# EAGLE board HotFire_BreakoutBoard (EAGLE 9.0.1)
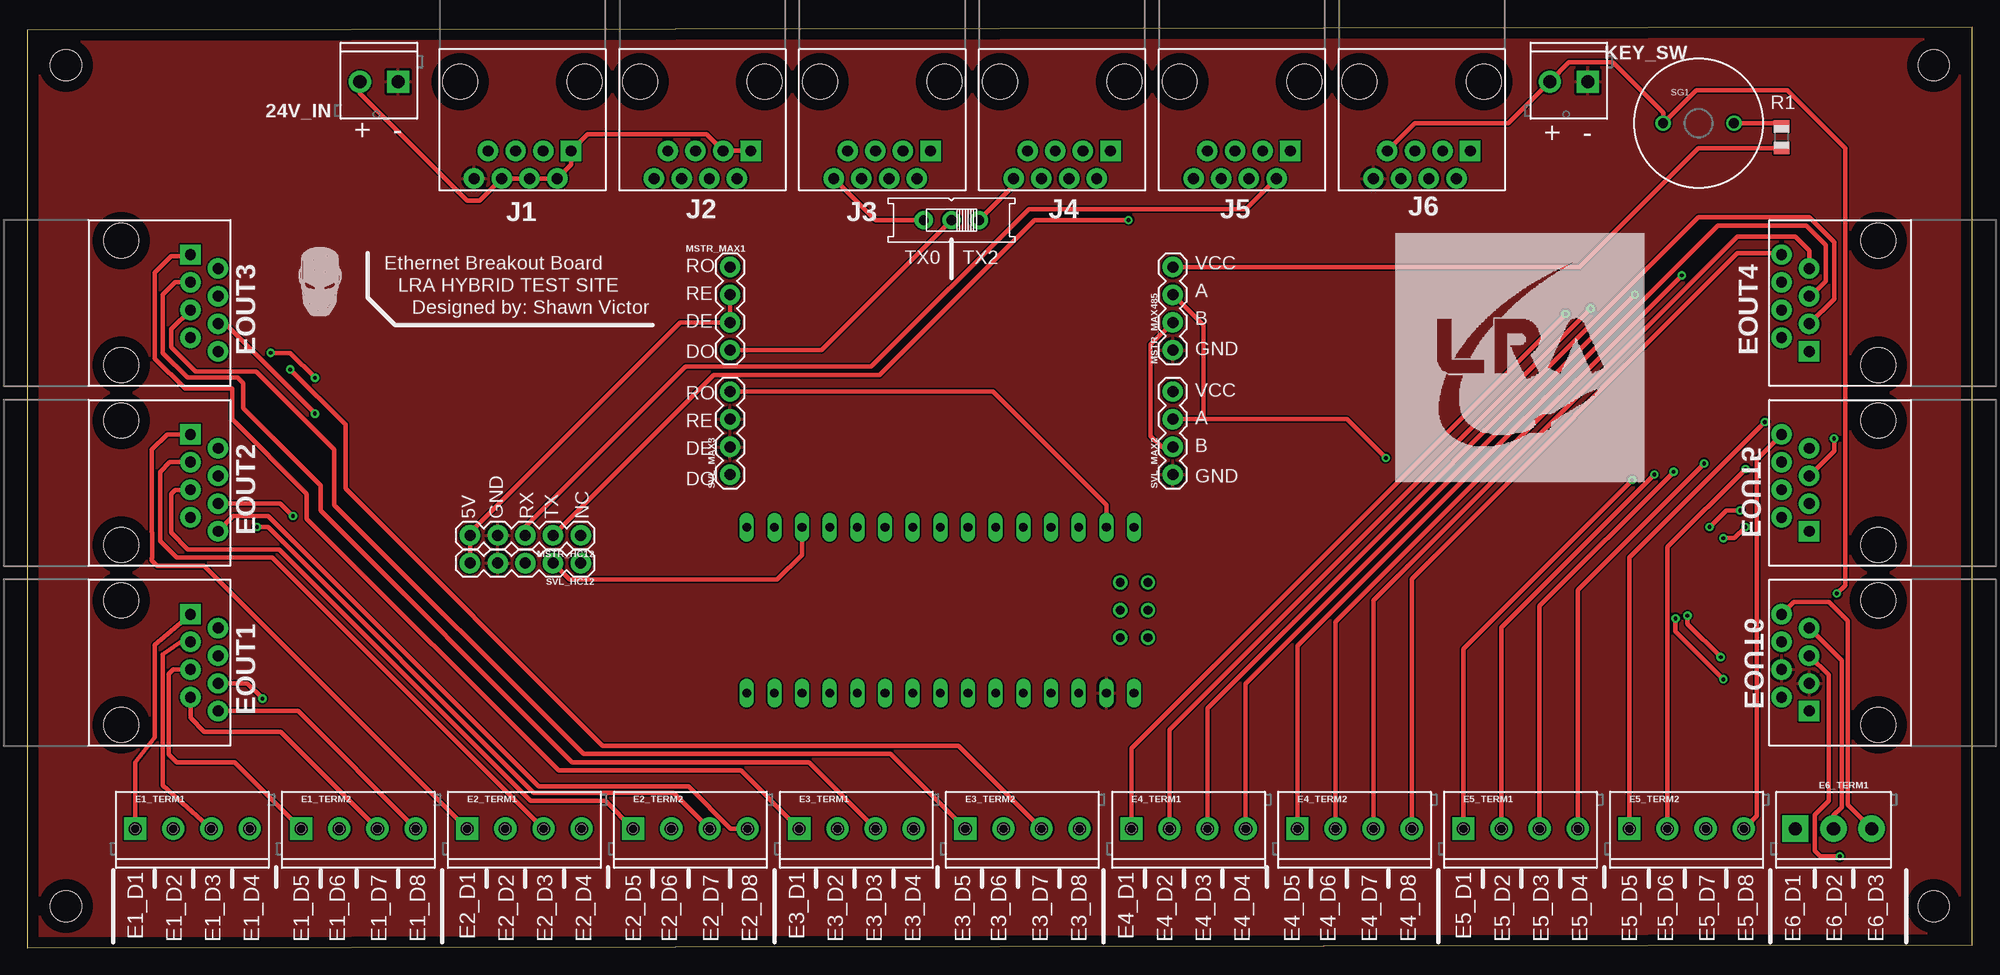
[diagram p0: board, top side]
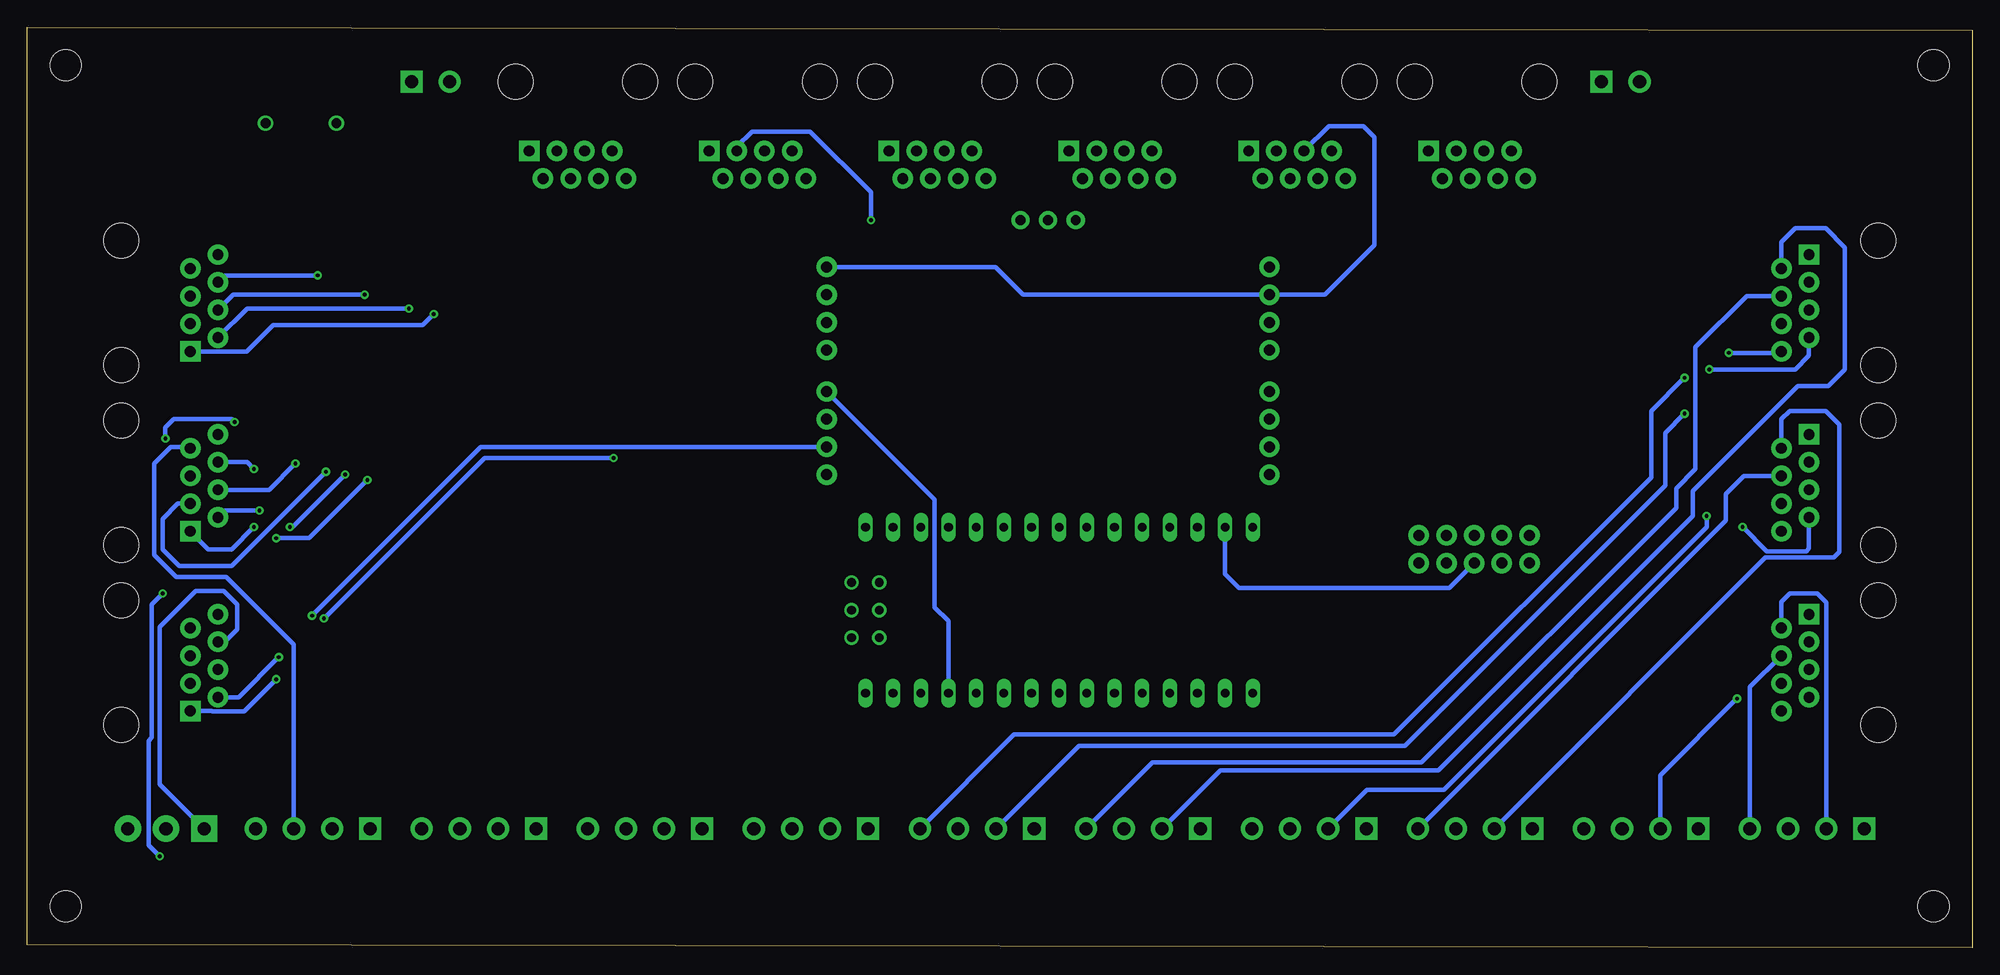
[diagram p1: board, bottom side, seen from below]

Size 178.54 x 84.51 mm. Coordinates in mm from the lower left corner, seen from the top.
Outline: 0,0 178.54,0.25 178.54,84.51 0,84.25 0,0
Copper layers (1*16): Top 0.035mm / dielectric 1.5mm / Bottom 0.035mm
Design rules "default": minimum track width 6mil, minimum drill 0.35mm, track to track 6mil, track to pad 6mil, pad to pad 6mil, via to via 6mil, smd to smd 6mil, copper to edge 40mil, drill to drill 6mil, minimum pad ring 10mil, minimum via ring 8mil, stop-mask expansion 4mil, vias tented up to drill 0mil, thermal gap 10mil
Net classes: 0 default: width 0.203 mm, drill 0.254 mm, clearance 0.127 mm; 1 16mil: width 0.254 mm, drill 0.254 mm, clearance 0.127 mm; 2 24mil: width 0.254 mm, drill 0.254 mm, clearance 0.127 mm; 3 32mil: width 0.254 mm, drill 0.254 mm, clearance 0.127 mm
Holes 2.84 mm at 3.56,81.03 3.56,3.81 175.01,81.03 175.01,3.81

## Footprints (pad centres in the part's own frame; a part is rotated, then mirrored left to right if it is on the bottom)
SCREWTERMINAL-3.5MM-2 = drill 1.2 pad 2.032 square: 1 0,0 | drill 1.2 pad 2.032: 2 3.5,0
SCREWTERMINAL-3.5MM-4 = drill 1.2 pad 2.032 square: 1 0,0 | drill 1.2 pad 2.032: 2 3.5,0; 3 7,0; 4 10.5,0
SCREWTERMINAL-3.5MM-3 = drill 1.2 pad 2.413 square: 1 0,0 | drill 1.2 pad 2.413: 2 3.5,0; 3 7,0
RJ45-8 = drill 1 pad 1.88 square: 1 -4.445,6.35 | drill 1 pad 1.88: 2 -3.175,8.89; 3 -1.905,6.35; 4 -0.635,8.89; 5 0.635,6.35; 6 1.905,8.89; 7 3.175,6.35; 8 4.445,8.89 | hole 3.2: -5.715,0; 5.715,0
1X05 = drill 1.016 pad 1.88: 1 0,0; 2 2.54,0; 3 5.08,0; 4 7.62,0; 5 10.16,0
1X04 = drill 1.016 pad 1.88: 1 0,0; 2 2.54,0; 3 5.08,0; 4 7.62,0
R0805 = smd 1.1 x 1.4: 1 -1,0; 2 1,0
EG1218 = drill 0.9 pad 1.676: O -2.54,0; P 0,0; S 2.54,0
BUZZER-12MM = drill 0.9: + 3.25,0; - -3.25,0
NANO = drill 0.8 long: 3.3V -10.16,24.13; 5V -10.16,-1.27; A0 -10.16,19.05; A1 -10.16,16.51; A2 -10.16,13.97; A3 -10.16,11.43; A4 -10.16,8.89; A5 -10.16,6.35; A6 -10.16,3.81; A7 -10.16,1.27; AREF -10.16,21.59; D2 5.08,1.27; D3 5.08,3.81; D4 5.08,6.35; D5 5.08,8.89; D6 5.08,11.43; D7 5.08,13.97; D8 5.08,16.51; D9 5.08,19.05; D10 5.08,21.59; D11 5.08,24.13; D12 5.08,26.67; D13 -10.16,26.67; GND -10.16,-6.35; GND1 5.08,-1.27; RAW -10.16,-8.89; RST -10.16,-3.81; RST1 5.08,-3.81; RX1 5.08,-6.35; TX0 5.08,-8.89 | drill 0.8: ICSP1 -5.08,-10.16; ICSP2 -5.08,-7.62; ICSP3 -2.54,-10.16; ICSP4 -2.54,-7.62; ICSP5 0,-10.16; ICSP6 0,-7.62

## Placement (x,y rotation side)
24V_IN  [SCREWTERMINAL-3.5MM-2]  34.04,79.5 180 top
E1_TERM1  [SCREWTERMINAL-3.5MM-4]  9.91,10.92 0 top
E1_TERM2  [SCREWTERMINAL-3.5MM-4]  25.15,10.92 0 top
E2_TERM1  [SCREWTERMINAL-3.5MM-4]  40.39,10.92 0 top
E2_TERM2  [SCREWTERMINAL-3.5MM-4]  55.63,10.92 0 top
E3_TERM1  [SCREWTERMINAL-3.5MM-4]  70.87,10.92 0 top
E3_TERM2  [SCREWTERMINAL-3.5MM-4]  86.11,10.92 0 top
E4_TERM1  [SCREWTERMINAL-3.5MM-4]  101.35,10.92 0 top
E4_TERM2  [SCREWTERMINAL-3.5MM-4]  116.59,10.92 0 top
E5_TERM1  [SCREWTERMINAL-3.5MM-4]  131.83,10.92 0 top
E5_TERM2  [SCREWTERMINAL-3.5MM-4]  147.07,10.92 0 top
E6_TERM1  [SCREWTERMINAL-3.5MM-3]  162.31,10.92 0 top
EOUT1  RJ45  [RJ45-8]  8.64,26.16 270 top
EOUT2  RJ45  [RJ45-8]  8.64,42.67 270 top
EOUT3  RJ45  [RJ45-8]  8.64,59.18 270 top
EOUT4  RJ45  [RJ45-8]  169.93,59.18 90 top
EOUT5  RJ45  [RJ45-8]  169.93,42.67 90 top
EOUT6  RJ45  [RJ45-8]  169.93,26.16 90 top
J1  RJ45  [RJ45-8]  45.47,79.5 180 top
J2  RJ45  [RJ45-8]  61.98,79.5 180 top
J3  RJ45  [RJ45-8]  78.49,79.5 180 top
J4  RJ45  [RJ45-8]  95,79.5 180 top
J5  RJ45  [RJ45-8]  111.51,79.5 180 top
J6  RJ45  [RJ45-8]  128.02,79.5 180 top
KEY_SW  [SCREWTERMINAL-3.5MM-2]  143.26,79.5 180 top
MSTR_HC12  [1X05]  50.8,37.85 180 top
MSTR_MAX1  [1X04]  64.52,54.86 90 top
MSTR_MAX485  [1X04]  105.16,54.86 90 top
R1  100  [R0805]  161.04,74.42 270 top
S1  [EG1218]  84.84,66.8 180 top
SG1  BUZZERPTH  [BUZZER-12MM]  153.42,75.69 0 top
SVL_HC12  [1X05]  50.8,35.31 180 top
SVL_MAX2  [1X04]  105.16,43.43 90 top
SVL_MAX3  [1X04]  64.52,43.43 90 top
U$4  NANO  [NANO]  92.71,33.53 90 top

## Library data of the parts
24V_IN KEY_SW = SparkFun-Connectors; PROD_ID: CONN-08399
E1_TERM1 E1_TERM2 E2_TERM1 E2_TERM2 E3_TERM1 E3_TERM2 E4_TERM1 E4_TERM2 E5_TERM1 E5_TERM2 = SparkFun-Connectors; PROD_ID: 2xCONN-08399; SF_ID: 2xPRT-08084
E6_TERM1 = SparkFun-Connectors; PROD_ID: CONN-08288; SF_ID: PRT-08235
EOUT1-EOUT6 J1-J6 = SparkFun-Connectors; PROD_ID: CONN-08506; SF_ID: PRT-00643
MSTR_HC12 SVL_HC12 = SparkFun-Connectors
MSTR_MAX1 MSTR_MAX485 SVL_MAX2 SVL_MAX3 = SparkFun-Connectors; PROD_ID: CONN-09696
R1 S1 = adafruit
SG1 = SparkFun
U$4 = Arduino-clone

## Nets
5.0V [16mil]: J2.5 MSTR_HC12.5 MSTR_MAX1.2 MSTR_MAX1.3 MSTR_MAX485.4 R1.2 SVL_HC12.5
+24V [24mil]: 24V_IN.2 J1.1 J1.2 J1.4 J1.6 J2.1 J2.3
ADC0: J6.1
ADC1: J6.2
ADC2: J6.3
ADC3: J6.4
ADC4: J6.5
ADC5: J6.6
D0/RX0: J3.7
D1/TX0: J3.8 S1.S
D10: SVL_HC12.2 U$4.D10
D11: SVL_HC12.3 U$4.D11
D+: J3.5
D-: J3.6
E1_D1: E1_TERM1.1 EOUT1.1
E1_D2: E1_TERM1.2 EOUT1.2
E1_D3: E1_TERM1.3 EOUT1.3
E1_D4: E1_TERM1.4 EOUT1.4
E1_D5: E1_TERM2.1 EOUT1.5
E1_D6: E1_TERM2.2 EOUT1.6
E1_D7: E1_TERM2.3 EOUT1.7
E1_D8: E1_TERM2.4 EOUT1.8
E2_D1: E2_TERM1.1 EOUT2.1
E2_D2: E2_TERM1.2 EOUT2.2
E2_D3: E2_TERM1.3 EOUT2.3
E2_D4: E2_TERM1.4 EOUT2.4
E2_D5: E2_TERM2.1 EOUT2.5
E2_D6: E2_TERM2.2 EOUT2.6
E2_D7: E2_TERM2.3 EOUT2.7
E2_D8: E2_TERM2.4 EOUT2.8
E3_D1: E3_TERM1.1 EOUT3.1
E3_D2: E3_TERM1.2 EOUT3.2
E3_D3: E3_TERM1.3 EOUT3.3
E3_D4: E3_TERM1.4 EOUT3.4
E3_D5: E3_TERM2.1 EOUT3.5
E3_D6: E3_TERM2.2 EOUT3.6
E3_D7: E3_TERM2.3 EOUT3.7
E3_D8: E3_TERM2.4 EOUT3.8
E4_D1: E4_TERM1.1 EOUT4.1
E4_D2: E4_TERM1.2 EOUT4.2
E4_D3: E4_TERM1.3 EOUT4.3
E4_D4: E4_TERM1.4 EOUT4.4
E4_D5: E4_TERM2.1 EOUT4.5
E4_D6: E4_TERM2.2 EOUT4.6
E4_D7: E4_TERM2.3 EOUT4.7
E4_D8: E4_TERM2.4 EOUT4.8
E5_D1: E5_TERM1.1 EOUT5.1
E5_D2: E5_TERM1.2 EOUT5.2
E5_D3: E5_TERM1.3 EOUT5.3
E5_D4: E5_TERM1.4 EOUT5.4
E5_D5: E5_TERM2.1 EOUT5.5
E5_D6: E5_TERM2.2 EOUT5.6
E5_D7: E5_TERM2.3 EOUT5.7
E5_D8: E5_TERM2.4 EOUT5.8
E6_D1: E6_TERM1.1 EOUT6.6
E6_D2: E6_TERM1.2 EOUT6.7
E6_D3: E6_TERM1.3 EOUT6.8
ETHERNET1: J4.1
ETHERNET2: J4.2
ETHERNET3: J4.3
ETHERNET4: J4.4
ETHERNET5: J4.5
ETHERNET6: J4.6
ETHERNET7: J4.7
ETHERNET8: J4.8 S1.O
ETHERNET9: J5.1
ETHERNET10: J5.2 MSTR_HC12.3
ETHERNET11: J5.3 MSTR_HC12.2
ETHERNET12: J5.4
ETHERNET13: J5.5
ETHERNET14: J5.6
ETHERNET15: J5.7
ETHERNET16: J5.8
GND [32mil]: 24V_IN.1 EOUT6.3 EOUT6.4 J1.8 J6.8 KEY_SW.1 MSTR_HC12.4 MSTR_MAX485.1 SVL_HC12.4 SVL_MAX2.1 SVL_MAX3.2 SVL_MAX3.3 U$4.GND
IGNITER_SW- [32mil]: J2.6
KEY_SW+ [32mil]: EOUT6.5 J6.7 KEY_SW.2 SG1.-
LS1: J2.7
LS2: J2.8
LS3: J3.1
LS4: J3.2
LS5: J3.3
MAX_A: EOUT6.1 MSTR_MAX485.3 SVL_MAX2.3
MAX_B: EOUT6.2 MSTR_MAX485.2 SVL_MAX2.2
N$1: MSTR_MAX1.1 S1.P
N$5 [16mil]: R1.1 SG1.+
NV_2_SW- [24mil]: J1.5
OV_4_SW- [24mil]: J1.7
OV_5_SW- [24mil]: J2.2
SLV_RX: SVL_MAX3.4 U$4.RX1
SOL_5_SW- [24mil]: J2.4
SVL_5V: SVL_MAX2.4 U$4.5V
VUSB [16mil]: J3.4
WSV_2_SW- [24mil]: J1.3

## Tracks (layer width: path | path; a pad name or v marks a point on that pad's centre or on a via)
5.0V
  Top 0.406: MSTR_MAX1.3 MSTR_MAX1.2 59.94,57.4 40.64,38.1 MSTR_HC12.5 SVL_HC12.5 | MSTR_MAX485.4 142.49,62.48 153.42,73.41 161.02,73.41 R1.2
  Bottom 0.406: J2.5 59.05,75.44 55.88,75.44 54.86,74.42 54.86,64.52 59.44,59.94 MSTR_MAX1.3 87.12,59.94 89.66,62.48 MSTR_MAX485.4
+24V
  Top 0.406: 24V_IN.2 30.54,78.43 40.39,68.58 41.53,68.58 J1.6 J1.4 J1.2 49.91,71.88 J1.1 51.44,74.68 62.36,74.68 J2.3 J2.1
D1/TX0
  Top 0.406: J3.8 77.85,66.8 S1.S
D10
  Top 0.406: SVL_HC12.2 49.78,33.78 68.83,33.78 71.12,36.07 U$4.D10
D11
  Bottom 0.406: SVL_HC12.3 48.01,33.02 67.31,33.02 68.58,34.29 U$4.D11
E1_D1
  Top 0.406: E1_TERM1.1 9.91,17.02 11.68,19.3 11.68,27.81 EOUT1.1
E1_D2
  Bottom 0.406: E1_TERM1.2 13.41,31.69 14.22,32.51 16.76,32.51 17.53,31.75 EOUT1.2
E1_D3
  Top 0.406: E1_TERM1.3 12.45,14.87 12.45,26.92 14.1,28.07 EOUT1.3
E1_D4
  Bottom 0.406: E1_TERM1.4 20.41,23.92 EOUT1.4
E1_D5
  Top 0.406: E1_TERM2.1 19.05,17.02 13.72,17.02 13.01,17.73 13.01,25.15 13.39,25.53 EOUT1.5
E1_D6  (via drill 0.35)
  Top 0.406: v21.59,22.86 20.19,24.26 EOUT1.6
  Bottom 0.406: E1_TERM2.2 28.65,15.8 v21.59,22.86
E1_D7
  Top 0.406: E1_TERM2.3 23.26,19.81 16.26,19.81 14.99,21.08 EOUT1.7
E1_D8
  Top 0.406: E1_TERM2.4 24.85,21.72 EOUT1.8
E2_D1
  Top 0.406: E2_TERM1.1 16.26,35.05 11.94,35.05 11.43,35.56 11.43,35.76 11.46,35.79 11.46,38.12 11.43,38.15 11.43,45.72 12.83,47.12 EOUT2.1
E2_D2
  Bottom 0.406: E2_TERM1.2 18.99,35.81 12.7,35.81 12.19,36.32 12.19,48.01 13.46,49.28 16.76,49.28 17.53,48.51 EOUT2.2
E2_D3
  Top 0.406: E2_TERM1.3 22.49,35.81 13.72,35.81 12.19,37.34 12.19,43.69 13.08,44.58 EOUT2.3
E2_D4
  Bottom 0.406: E2_TERM1.4 22.61,39.2 22.61,41.66 20.95,43.31 EOUT2.4
E2_D5
  Top 0.406: E2_TERM2.1 53.09,13.46 46.23,13.46 23.11,36.58 14.73,36.58 13.21,38.1 13.21,41.66 13.59,42.04 EOUT2.5
E2_D6  (via drill 0.35)
  Top 0.406: v24.38,39.62 23.24,40.77 EOUT2.6
  Bottom 0.406: E2_TERM2.2 55.57,14.48 48.51,14.48 24.38,38.61 v24.38,39.62
E2_D7  (via drill 0.35)
  Top 0.406: E2_TERM2.3 59.32,14.22 46.48,14.22 22.1,38.61 v21.08,38.61
  Bottom 0.406: v21.08,38.61 18.85,36.37 15.24,36.37 14.99,36.63 EOUT2.7
E2_D8
  Top 0.406: E2_TERM2.4 64.57,10.92 60.7,14.78 46.94,14.78 22.1,39.62 18.92,39.62 EOUT2.8
E3_D1
  Top 0.406: E3_TERM1.1 65.53,16.26 48.77,16.26 25.65,39.37 25.65,41.66 18.8,48.51 18.8,51.31 14.48,51.31 11.68,54.1 11.68,61.98 13.21,63.5 14.86,63.5 EOUT3.1
E3_D2
  Bottom 0.406: E3_TERM1.2 69.03,16.26 49.02,16.26 25.65,39.62 25.65,41.91 16,51.56 13.21,51.56 11.68,53.09 11.68,64.26 13.46,66.04 16.26,66.04 17.53,64.77 EOUT3.2
E3_D3
  Top 0.406: E3_TERM1.3 71.77,17.02 50.04,17.02 26.92,40.13 26.92,42.42 19.81,49.53 19.81,51.82 19.3,52.32 14.73,52.32 12.45,54.61 12.45,59.94 13.59,61.09 EOUT3.3
E3_D4
  Bottom 0.406: E3_TERM1.4 75.27,17.02 50.55,17.02 27.18,40.39 27.18,42.16 25.4,43.94 25.4,55.12 20.7,59.82 EOUT3.4
E3_D5
  Top 0.406: E3_TERM2.1 79.25,17.78 51.05,17.78 28.19,40.64 28.19,45.72 21.03,52.88 15.44,52.88 13.21,55.12 13.21,56.77 EOUT3.5
E3_D6  (via drill 0.35)
  Top 0.406: v26.42,49.02 18.16,57.28 EOUT3.6
  Bottom 0.406: E3_TERM2.2 81.99,18.54 52.07,18.54 28.19,42.42 28.19,47.24 v26.42,49.02
E3_D7  (via drill 0.35)
  Top 0.406: E3_TERM2.3 85.49,18.54 52.83,18.54 29.21,42.16 29.21,48.01 v24.13,53.09
  Bottom 0.406: v24.13,53.09 16.26,53.09 14.99,54.36 EOUT3.7
E3_D8  (via drill 0.35)
  Top 0.406: v26.42,52.32 24.13,54.61 v22.35,54.61
  Bottom 0.406: E3_TERM2.4 87.97,19.56 53.09,19.56 29.46,43.18 29.46,49.28 v26.42,52.32 | v22.35,54.61 17.65,54.61 EOUT3.8
E4_D1  (via drill 0.35)
  Top 0.406: E4_TERM1.1 101.35,18.29 v141.22,58.17
  Bottom 0.406: v141.22,58.17 142.24,57.15 155.96,57.15 158.39,54.71 161.57,54.71 161.6,54.74 EOUT4.1
E4_D2  (via drill 0.35)
  Top 0.406: E4_TERM1.2 104.85,20.01 v143.51,58.67
  Bottom 0.406: v143.51,58.67 158.37,58.67 EOUT4.2
E4_D3
  Top 0.406: E4_TERM1.3 108.35,21.99 153.42,67.06 163.58,67.06 165.86,64.77 165.86,59.56 EOUT4.3
E4_D4  (via drill 0.35)
  Top 0.406: E4_TERM1.4 111.85,24.22 v147.57,59.94
  Bottom 0.406: v147.57,59.94 159.64,59.94 EOUT4.4
E4_D5
  Top 0.406: E4_TERM2.1 116.59,27.69 155.19,66.29 163.32,66.29 165.1,64.52 165.1,61.21 163.7,59.82 EOUT4.5
E4_D6  (via drill 0.35)
  Top 0.406: E4_TERM2.2 120.09,29.92 v151.89,61.72
  Bottom 0.406: v151.89,61.72 160.4,61.72 EOUT4.6
E4_D7
  Top 0.406: E4_TERM2.3 123.59,31.89 156.97,65.28 162.31,65.28 163.58,64.01 EOUT4.7
E4_D8
  Top 0.406: E4_TERM2.4 127.09,33.87 156.97,63.75 160.91,63.75 EOUT4.8
E5_D1  (via drill 0.35)
  Top 0.406: E5_TERM1.1 131.83,27.43 v147.32,42.93 | v155.7,37.59 156.72,37.59 v157.73,38.61
  Bottom 0.406: v147.32,42.93 152.65,37.59 v155.7,37.59 | v157.73,38.61 159.77,36.58 161.93,36.58 EOUT5.1
E5_D2  (via drill 0.35)
  Top 0.406: E5_TERM1.2 135.33,29.41 v149.35,43.43 | v154.43,38.61 155.96,40.13 v157.23,40.13
  Bottom 0.406: v149.35,43.43 154.18,38.61 v154.43,38.61 | v157.23,40.13 160.4,40.13 EOUT5.2
E5_D3  (via drill 0.35)
  Top 0.406: E5_TERM1.3 138.83,31.38 v151.13,43.69
  Bottom 0.406: v151.13,43.69 159.77,35.05 164.59,35.05 166.12,36.58 166.12,39.37 164.72,40.77 EOUT5.3
E5_D4  (via drill 0.35)
  Top 0.406: E5_TERM1.4 142.33,32.85 v153.92,44.45
  Bottom 0.406: v153.92,44.45 156.34,42.04 EOUT5.4
E5_D5  (via drill 0.35)
  Top 0.406: E5_TERM2.1 147.07,35.81 v159.51,48.26 | EOUT5.5 165.86,45.59 v165.86,46.74
  Bottom 0.406: v159.51,48.26 159.77,48.51 165.1,48.51 165.86,47.75 v165.86,46.74
E5_D6  (via drill 0.35)
  Top 0.406: E5_TERM2.2 150.57,36.77 v157.73,43.94
  Bottom 0.406: v157.73,43.94 158.37,44.58 EOUT5.6
E5_D7
  Bottom 0.406: E5_TERM2.3 154.07,27.83 160.27,34.04 164.85,34.04 166.88,36.07 166.88,44.45 165.35,45.97 163.7,45.97 EOUT5.7
E5_D8
  Top 0.406: E5_TERM2.4 158.75,12.11 158.75,44.83 EOUT5.8
E6_D1
  Bottom 0.406: E6_TERM1.1 166.37,14.99 166.37,29.46 163.07,32.77 160.53,32.77 159.26,31.5 159.26,29.21 160.4,28.07 EOUT6.6
E6_D2
  Top 0.406: E6_TERM1.2 165.81,12.14 166.55,12.88 166.55,26.37 EOUT6.7
E6_D3
  Top 0.406: E6_TERM1.3 167.11,13.12 167.11,21.62 167.13,21.64 167.13,29.97 165.35,31.75 162.18,31.75 EOUT6.8
ETHERNET8
  Top 0.406: J4.8 90.55,69.98 S1.O
ETHERNET10
  Top 0.406: MSTR_HC12.3 45.72,38.61 60.45,53.34 77.47,53.34 91.95,67.82 111.89,67.82 J5.2
ETHERNET11  (via drill 0.35)
  Top 0.406: MSTR_HC12.2 62.99,52.58 78.23,52.58 92.46,66.8 v101.09,66.8
  Bottom 0.406: v101.09,66.8 101.09,69.34 106.68,74.93 112.01,74.93 113.41,73.53 J5.3
GND
  pour Top: -0.25,-0.25 0,84.58 178.56,84.58 178.56,0
KEY_SW+  (via drill 0.35)
  Top 0.406: J6.7 127.38,75.69 135.95,75.69 KEY_SW.2 141.53,81.28 145.54,81.28 150.17,76.66 SG1.- 153.21,78.74 161.54,78.74 166.88,73.41 166.88,33.27 v166.12,32.51 | EOUT6.5 165.35,25.02 165.35,13.46 164.08,12.19 164.08,8.89 164.59,8.38 v166.37,8.38
  Bottom 0.406: v166.37,8.38 167.39,9.4 167.39,19 167.11,19.28 167.11,31.52 v166.12,32.51
MAX_A  (via drill 0.35)
  Top 0.406: v155.7,24.64 151.3,29.04 v151.3,30.23 | v124.71,44.96 121.16,48.51 107.95,48.51 | 107.95,48.51 SVL_MAX2.3 | MSTR_MAX485.3 107.95,57.15 107.95,48.51
  Bottom 0.406: EOUT6.1 161.6,21.72 161.57,21.69 158.65,21.69 v155.7,24.64 | v151.3,30.23 136.57,44.96 v124.71,44.96
MAX_B  (via drill 0.35)
  Top 0.406: v155.45,26.67 152.4,29.72 v152.4,30.48 | MSTR_MAX485.2 103.12,55.37 103.12,46.99 104.14,45.97 SVL_MAX2.2
  Bottom 0.406: EOUT6.2 159.13,22.99 v155.45,26.67 | v152.4,30.48 136.91,45.97 SVL_MAX2.2
N$1
  Top 0.406: MSTR_MAX1.1 72.9,54.86 S1.P
N$5
  Top 0.406: SG1.+ 160.77,75.69 R1.1
SLV_RX
  Top 0.406: U$4.RX1 99.06,40.64 88.65,51.05 SVL_MAX3.4
SVL_5V
  Bottom 0.406: SVL_MAX2.4 95.25,41.15 95.25,31.24 93.98,29.97 U$4.5V

## Text on the board
tPlace: + | - | + | - | Ethernet Breakout Board | RO | TX0 | TX2 | VCC | LRA HYBRID TEST SITE | RE | A | Designed by: Shawn Victor | DE | B | DO | GND | RO | VCC | A | RE | DE | B | DO | GND | 5V | GND | RX | TX | NC | E1_D1 | E2_D1 | E3_D1 | E4_D1 | E5_D1 | E1_D2 | E1_D3 | E1_D4 | E1_D5 | E1_D6 | E1_D7 | E1_D8 | E2_D2 | E2_D3 | E2_D4 | E2_D5 | E2_D6 | E2_D7 | E2_D8 | E3_D2 | E3_D3 | E3_D4 | E3_D5 | E3_D6 | E3_D7 | E3_D8 | E4_D2 | E4_D3 | E4_D4 | E4_D5 | E4_D6 | E4_D7 | E4_D8 | E5_D2 | E5_D3 | E5_D4 | E5_D5 | E5_D6 | E5_D7 | E5_D8 | E6_D1 | E6_D2 | E6_D3